# Altium PCB PCB1.PcbDoc
Units mil, origin at the board's own origin, x right, y up, seen from the top; angles counter-clockwise.
Board outline 6000 x 4000 mil, 2 copper layers (Top Layer, Bottom Layer); 51 components, 45 nets, 242 pads, 0 vias.
Unrouted connection lines stored in the file: 10.
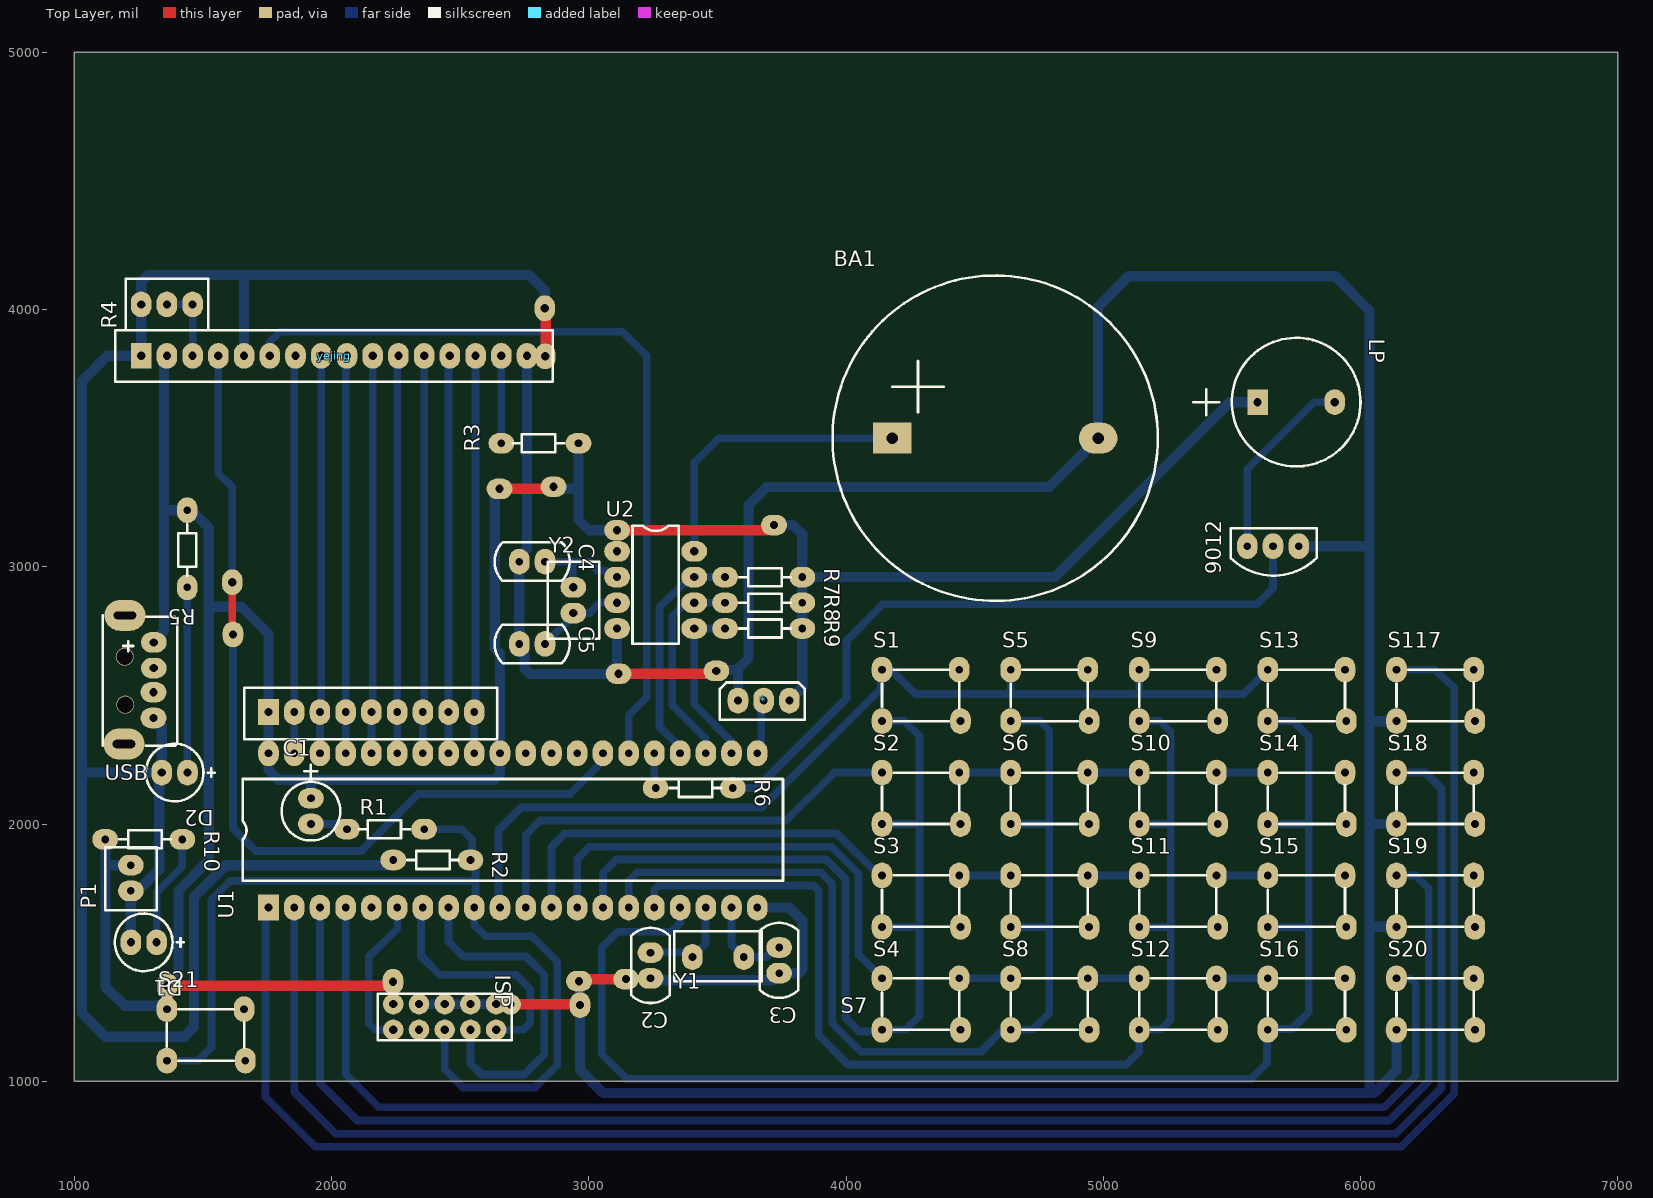
[diagram p0: Top Layer view]
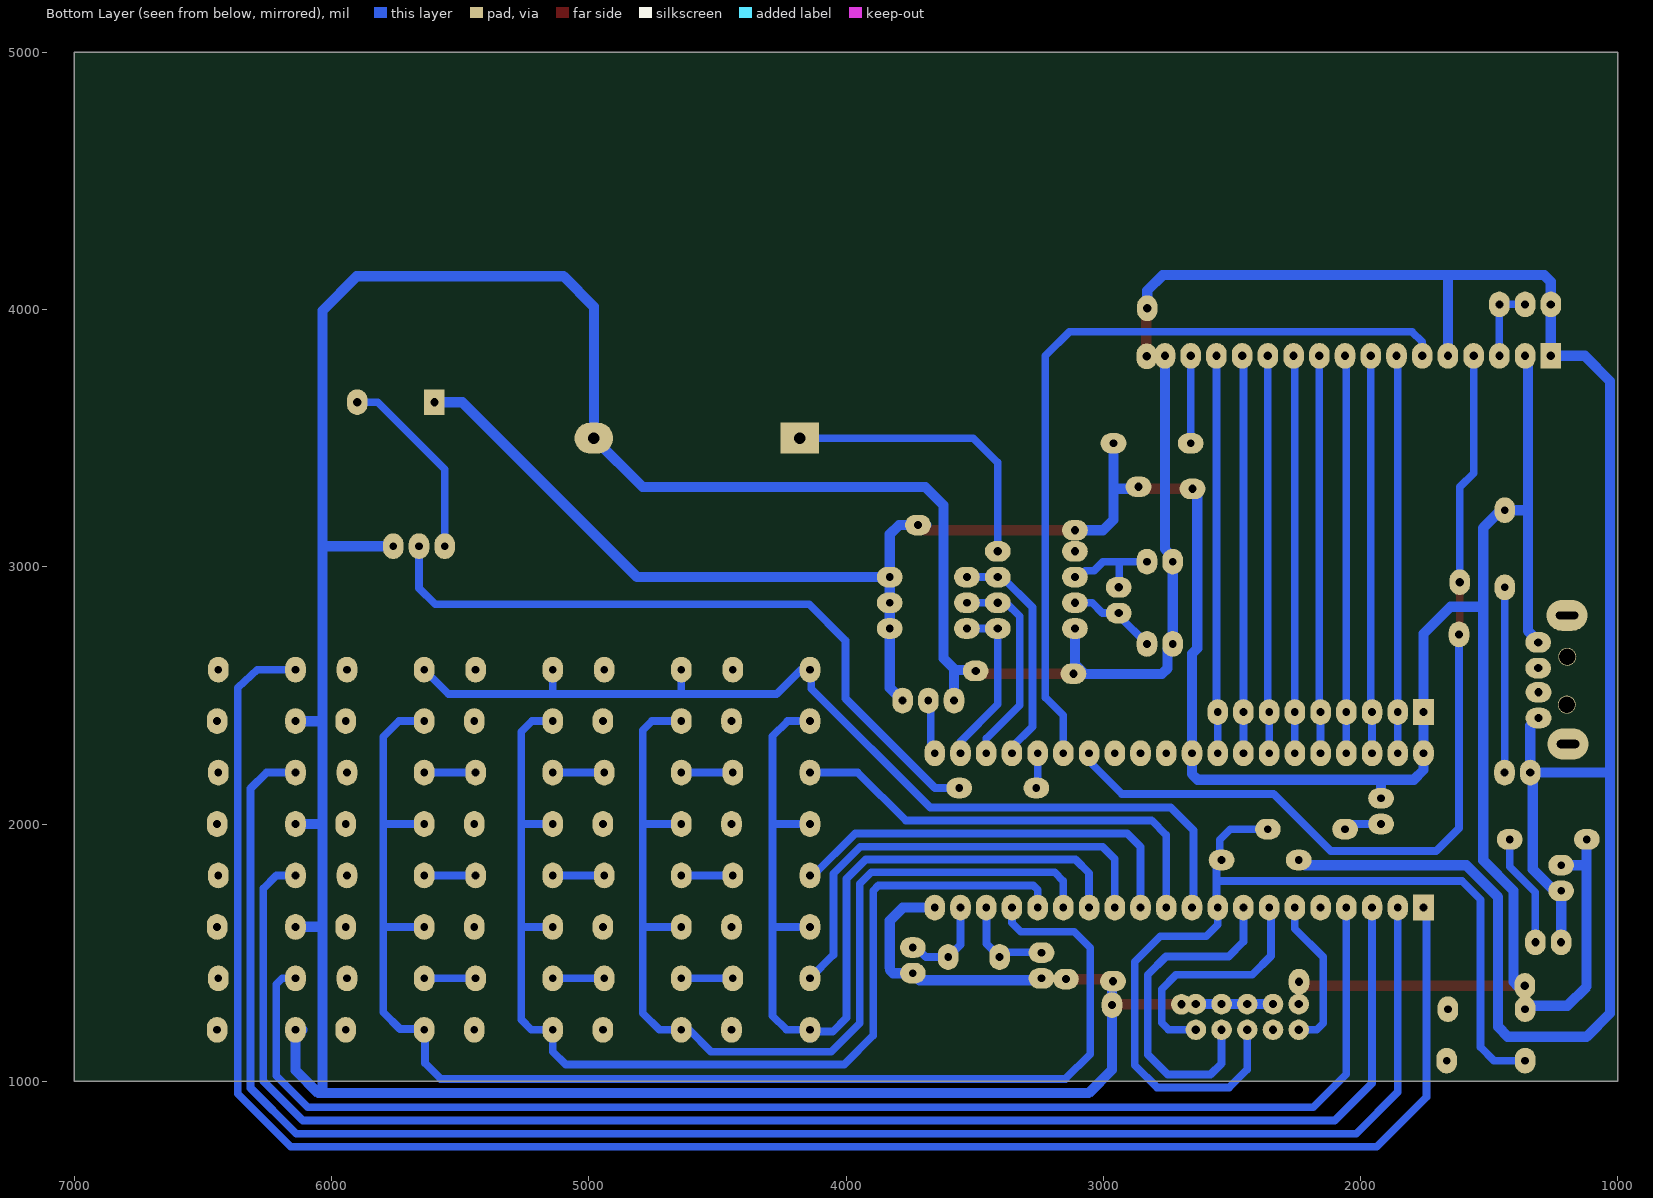
[diagram p1: Bottom Layer view, seen from below]

## Layer stack, top to bottom
Top Layer: signal copper 1.4
Dielectric: dielectric 12.6, FR-4, Dk 4.8
Bottom Layer: signal copper 1.4

## Board outline
1000,1000 7000,1000 7000,5000 1000,5000

## Design rules (kind name [scope] priority, off if disabled: settings)
Clearance [All] p1: gap=20
ComponentClearance [All] p1: gap=10 collisioncheckmode=3 verticalgap=10
PolygonConnect [All] p1: connectstyle=Relief reliefconductorwidth=10 reliefentries=4 polygonreliefangle="90 Angle"
RoutingVias [All] p1: holewidth=28 width=50 viastyle="Through Hole" minholewidth=28 minwidth=50 maxholewidth=28 maxwidth=50
SolderMaskExpansion [All] p1: expansion=4
TestPointUsage [All] p1: valid=0 allowmultiple=FALSE
Testpoint [All] p1: side=15 testpointundercomponent=TRUE minsize=40 maxsize=100 preferedsize=60 minholesize=0 maxholesize=40 preferedholesize=32 testpointgrid=1 style=1023 order=0123456789
Width Width_VCC [InNet('VCC')] p1: maxlimit=40 minlimit=40 preferedwidth=40
Width Width_GND [InNet('GND')] p2: maxlimit=40 minlimit=40 preferedwidth=40
Width [All] p3: maxlimit=30 minlimit=30 preferedwidth=30
18 further rules are at their usual default settings.

## Components (designator, comment, footprint, x,y, rotation, side; value= is the part's Value field where it differs from the comment)
9012 "PNP" 三极管 5760,3080 r180 top
* "18B20" 18B20 3580,2480 r0 top
BA1 "Battery" DIANZI 4180,3500 r0 top
C1 "Cap Pol1" 电解电容 1920,2100 r0 top
C2 "Cap" cap 3240,1500 r270 top
C3 "Cap" cap 3740,1520 r270 top
C4 "Cap" cap 2730,3020 r0 top
C5 "Cap" cap 2730,2700 r0 top
D1 "LED0" led 1320,1540 r180 top
D2 "LED0" led 1440,2200 r180 top
ISP "ISP" ISP 2240,1300 r0 top (schematic designator ?)
LP "Speaker" beep 5600,3640 r0 top
P1 "Header 2" 电源 1220,1740 r90 top
R1 "Res2" RES 2360,1980 r180 top
R2 "Res2" res 2240,1860 r0 top
R3 "Res2" res 2960,3480 r180 top
R4 "Res Tap" 3CZ 1360,4020 r90 top
R5 "Res2" RES 1439,3220 r270 top
R6 "Res2" res 3260,2140 r0 top
R7 "Res2" res 3530,2960 r0 top
R8 "Res2" res 3530,2860 r0 top
R9 "Res2" res 3530,2760 r0 top
R10 "Res2" res 1120,1940 r0 top
S1 "按键" AJ 4140,2600 r0 top
S2 "按键" AJ 4140,2200 r0 top
S3 "按键" AJ 4140,1800 r0 top
S4 "按键" AJ 4140,1400 r0 top
S5 "按键" AJ 4640,2600 r0 top
S6 "按键" AJ 4640,2200 r0 top
S7 "按键" AJ 4640,1800 r0 top
S8 "按键" AJ 4640,1400 r0 top
S9 "按键" AJ 5140,2600 r0 top
S10 "按键" AJ 5140,2200 r0 top
S11 "按键" AJ 5140,1800 r0 top
S12 "按键" AJ 5140,1400 r0 top
S13 "按键" AJ 5640,2600 r0 top
S14 "按键" AJ 5640,2200 r0 top
S15 "按键" AJ 5640,1800 r0 top
S16 "按键" AJ 5640,1400 r0 top
S18 "SW-PB" AJ 6140,2200 r0 top
S19 "SW-PB" AJ 6140,1800 r0 top
S20 "SW-PB" AJ 6140,1400 r0 top
S21 "SW-PB" AJ 1360,1280 r0 top
S117 "SW-PB" AJ 6140,2600 r0 top
U1 "AT89S52" AT89S52 1755,1975 r90 top
U2 "1302" DS1302 3110,3060 r0 top
USB "?" USB 1400,2300 r180 top
Y1 "XTAL" xtal 3603,1483 r180 top
Y2 "XTAL" xtalx 2940,2820 r90 top
yejing "1602" 1602 1260,3820 r90 top
? "上拉" 排阻 1755,2435 r90 top

## Footprints (in the part's own frame and the unit in brackets; to place one, negate y for a bottom-side part, rotate by r counter-clockwise, add the part's x,y. Pads: shape width x height; smd on the part's side, far side on the other; paste and mask are expansions set on the pad)
3CZ [mil]
  oval 100x80 hole 32: 1(0,100) 2(0,0) 3(0,-100)
  silkscreen extent -100,-160 100,160
18B20 [mil]
  oval 80x100 hole 30: 1(0,0) 2(100,0) 3(200,0)
  silkscreen extent -70,-75 260,70
1602 [mil]
  rect 100x80 hole 32: 1(0,0)
  oval 100x80 hole 32: 2(0,-100) 3(0,-200) 4(0,-300) 5(0,-400) 6(0,-500) 7(0,-600) 8(0,-700) 9(0,-800) 10(0,-900) 11(0,-1000) 12(0,-1100) 13(0,-1200) 14(0,-1300) 15(0,-1400) 16(0,-1500)
  silkscreen extent -100,-1600 100,100
AJ [mil]
  oval 80x100 hole 30: 1(0,-200) 2(0,0) 3(305,-200) 4(300,0)
  silkscreen extent 0,-200 300,0
AT89S52 [mil]
  rect 100x80 hole 30: 1(-300,0)
  oval 100x80 hole 30: 2(-300,-100) 3(-300,-200) 4(-300,-300) 5(-300,-400) 6(-300,-500) 7(-300,-600) 8(-300,-700) 9(-300,-800) 10(-300,-900) 11(-300,-1000) 12(-300,-1100) 13(-300,-1200) 14(-300,-1300) 15(-300,-1400) 16(-300,-1500) 17(-300,-1600) 18(-300,-1700) 19(-300,-1800) 20(-300,-1900) 21(300,-1900) 22(300,-1800) 23(300,-1700) 24(300,-1600) 25(300,-1500) 26(300,-1400) 27(300,-1300) 28(300,-1200) 29(300,-1100) 30(300,-1000) 31(300,-900) 32(300,-800) 33(300,-700) 34(300,-600) 35(300,-500) 36(300,-400) 37(300,-300) 38(300,-200) 39(300,-100) 40(300,0)
  silkscreen extent -195,-2000 200,100
beep [mil]
  rect 80x100 hole 32: 1(0,0)
  oval 80x100 hole 32: 2(300,0)
  silkscreen extent -250,-250 400,250
cap [mil]
  oval 80x100 hole 30: 1(0,0) 2(100,0)
  silkscreen extent -96,-75 196,75
DIANZI [mil]
  rect 150x120 hole 45: 1(0,0)
  oval 150x120 hole 45: 2(800,0)
  silkscreen extent -232,-632 1032,632
DS1302 [mil]
  oval 100x80 hole 32: 1(0,0) 2(0,-100) 3(0,-200) 4(0,-300) 5(300,-300) 6(300,-200) 7(300,-100) 8(300,0)
  silkscreen extent 60,-360 240,100
ISP [mil]
  round 80 hole 32: 1(0,-100) 2(0,0) 3(100,-100) 4(100,0) 5(200,-100) 6(200,0) 7(300,-100) 8(300,0) 9(400,-100) 10(400,0)
  silkscreen extent -60,-140 460,40
led [mil]
  oval 80x100 hole 32: 1(0,0) 2(100,0)
  silkscreen extent -106,-112 162,112
RES [mil]
  oval 100x80 hole 30: 1(0,0) 2(300,0)
  silkscreen extent 55,-35 255,35
res [mil]
  oval 100x80 hole 30: 1(0,0) 2(300,0)
  silkscreen extent 55,-35 255,35
USB [mil]
  oval 100x80 hole 32: 1(91,-406) 2(91,-306) 3(92,-212) 4(92,-112)
  round 70 hole 65: 5(202,-164) 6(204,-350)
  oval 160x120 hole 32 slot 86.61 at 0 deg: 32(207,-11)
  oval 160x120 hole 30 slot 86.61 at 0 deg: ""(203,-511)
  silkscreen extent 0,-511 290,-4
xtal [mil]
  oval 80x100 hole 30: 1(0,0) 2(200,0)
  silkscreen extent -70,-100 270,95
xtalx [mil]
  oval 80x100 hole 32: 1(0,0) 2(100,0)
  silkscreen extent -100,-100 200,100
三极管 [mil]
  oval 80x100 hole 30: 1(0,0) 2(100,0) 3(200,0)
  silkscreen extent -70,-70 265,114
排阻 [mil]
  rect 100x80 hole 30: 0(0,0)
  oval 100x80 hole 30: 1(0,-100) 2(0,-200) 3(0,-300) 4(0,-400) 5(0,-500) 6(0,-600) 7(0,-700) 8(0,-800)
  silkscreen extent -105,-890 95,95
电源 [mil]
  oval 80x100 hole 30: 1(0,0) 2(100,0)
  silkscreen extent -75,-100 170,100
电解电容 [mil]
  oval 100x80 hole 30: 1(0,0) 2(0,-100)
  silkscreen extent -114,-164 114,130

## Part data
9012: "PNP Bipolar Transistor"
BA1: "Multicell Battery"
C1: "Polarized Capacitor (Radial)"
C2 C3 C4 C5: "Capacitor"
D1 D2: "Typical INFRARED GaAs LED"
ISP: library part isp
LP: "Loudspeaker"
P1: "Header, 2-Pin"
R1 R2 R3 R5 R6 R7 R8 R9 R10: "Resistor"
R4: "Tapped Resistor"
S18 S19 S20 S21 S117: "Switch"
U2: library part DS1302
USB: library part USB
Y1 Y2: "Crystal Oscillator"
?: library part 排阻

## Free pads (board coordinates)
  oval 80x100 hole 32: 1(1361,1371) 1(1614,2940) 1(2831,3818) 2(1617,2737) 2(2239,1387) 2(2829,4005) 2(2966,1296)
  oval 100x80 hole 32: 1(2653,3303) 1(3110,3142) 1(3116,2584) 1(3145,1397) 2(2863,3311) 2(2962,1389) 2(3496,2595) 2(3720,3162)
  round 80 hole 32: 1(2696,1299)

## Nets (pads, with @x,y where several pads share a name; then routed paths per layer and width w, separated by ;. In a path a pad name is that pad's centre, name@x,y a point inside that pad or via, vN(x,y) a via of type N, cw(c..) or ccw(c..) an arc to the next point about the centre after c; other vN are vias at no path point)
GND: 9012.1 *.1 BA1.2 C2.2 C3.2 C4.1 C5.1 D1.2 D2.2 ISP.4 ISP.6 ISP.8 ISP.10 P1.1 pad.1@2696,1299 pad.1@2831,3818 pad.1@3116,2584 pad.1@3145,1397 pad.2@2829,4005 pad.2@2962,1389 pad.2@2966,1296 pad.2@3496,2595 R2.1 R4.1 S18.1 S19.1 S20.1 S117.1 U1.20 U2.4 USB.4 yejing.1 yejing.5 yejing.16 | length 23546.4
  Top Layer w40: pad.1@2696,1299 2963,1299 pad.2@2966,1296 ; pad.1@2833,3820 pad.2@2833,4014 ; pad.2@2948,1396 pad.1@3136,1396 ; pad.1@3116,2584 pad.2@3495,2584
  Bottom Layer w40: 1030,2205 1035,2200 D2.2 1340,2382 1310,2412 USB.4 ; D1.2 P1.1 1246,1740 1330,1824 D2.2@1330,2167 ; yejing.5 1660,4134 ; R2.1@2245,1870 2215,1840 1589,1840 1465,1716 1465,1211 1427,1173 1121,1173 1030,1264 1030,3722 1128,3820 yejing.1 1260,4108 1286,4134 2769,4134 2829,4074 pad.2@2829,4005 ; ISP.4 ISP.10@2646,1300 ; C4.1 C5.1 2750,2680 2750,2605 2772,2583 3072,2583 3110,2621 U2.4 ; C4.1@2730,3038.73 2760,3068.73 yejing.16 ; pad.2@2966,1389 2966,1045 3057,954 6051,954 6140,1043 S20.1 S20.1@6114,1200 ; pad.1@3091,2584 pad.1@3140,2584 ; C2.2@3240,1393 3713,1393 C3.2 3817,1420 3829.28,1432.28 ; pad.2@3507,2599 3565,2599 ; *.1 3580,2603 3621,2644 3621,3239 3692,3310 4790,3310 BA1.2 4980,4011 5098,4129 5902,4129 6035,3996 6035,965 ; U1.20 3779,1675 3830,1624 3830,1442 ; 9012.1 6023,3080 6035,3092 ; 6035,1991 6044,2000 S18.1 ; 6035,2389 6046,2400 S117.1 ; 6049,1600 S19.1
Net9012_2: 9012.2 R6.2 | length 2716.6
  Bottom Layer w30: R6.2 3654,2140 4002,2488 4002,2713 4143,2854 5597,2854 5660,2917 9012.2
Net9012_3: 9012.3 LP.2 | length 747.1
  Bottom Layer w30: 9012.3 5560,3379 5821,3640 LP.2
Net*_2: *.2 U1.21 | length 211.2
  Bottom Layer w30: U1.21 3670,2290 *.2@3670,2480
NetBA1_1: BA1.1 U2.8 | length 1154.4
  Bottom Layer w30: U2.8 3410,3405 3505,3500 BA1.1
NetC1_2: C1.2 R1.2 | length 120
  Bottom Layer w30: C1.2 R1.2@2040,2000
NetC2_1: C2.1 U1.18 Y1.2 | length 402.5
  Bottom Layer w30: C2.1@3240,1520 3259,1501 3385,1501 Y1.2 3454,1534 U1.18@3454,1686
NetC3_1: C3.1 U1.19 Y1.1 | length 350.5
  Bottom Layer w30: U1.19 3555,1531 Y1.1 3689.31,1483 C3.1@3726.31,1520
NetC4_2: C4.2 U2.2 Y2.2 | length 405.7
  Bottom Layer w30: C4.2 3001,3020 3036,2985 3070,2985 3095,2960 U2.2 ; 2938,3020 2938,2922 Y2.2
NetC5_2: C5.2 U2.3 Y2.1 | length 352.1
  Bottom Layer w30: C5.2 2940,2810 Y2.1 3003,2820 3043,2860 U2.3
NetD1_1: D1.1 R10.2 | length 441.4
  Bottom Layer w30: D1.1 1320,1734 1420,1834 R10.2
NetD2_1: D2.1 R5.2 | length 719
  Bottom Layer w30: D2.1@1439,2201 R5.2
NetR3_2: R3.2 yejing.15 | length 340
  Bottom Layer w30: R3.2 yejing.15
NetR4_2: R4.2 R4.3 yejing.3 | length 300
  Bottom Layer w30: R4.2 R4.3 yejing.3
P00: ?.1 U1.39 yejing.7 | length 1547.1
  Bottom Layer w30: U1.39 1855,3815 yejing.7
P01: ?.2 U1.38 yejing.8 | length 1531
  Bottom Layer w30: U1.38 ?.2 ; ?.2@1960,2449 yejing.8
P02: ?.3 U1.37 yejing.9 | length 1547.1
  Bottom Layer w30: U1.37 2055,3815 yejing.9
P03: ?.4 U1.36 yejing.10 | length 1568.7
  Bottom Layer w30: ?.4@2151,2433 2160,2424 yejing.10 ; U1.36 ?.4
P04: ?.5 U1.35 yejing.11 | length 1540
  Bottom Layer w30: U1.35 yejing.11@2255,3815
P05: ?.6 U1.34 yejing.12 | length 1547.1
  Bottom Layer w30: U1.34 ?.6 2360,2440 yejing.12
P06: ?.7 U1.33 yejing.13 | length 1547.1
  Bottom Layer w30: U1.33 2455,3815 yejing.13
P07: ?.8 U1.32 yejing.14 | length 1547.1
  Bottom Layer w30: U1.32 ?.8 2560,2440 yejing.14
P10: S117.2 U1.1 | length 7351.6
  Bottom Layer w30: U1.1@1743,1672 1743,939 1937,745 6159,745 6365,951 6365,2529.89 6287.73,2600 S117.2
P11: S18.2 U1.2 | length 6673.6
  Bottom Layer w30: U1.2 1855,958 2017.12,795.88 6127.88,795.88 ; 6137,795.88 6315,973.88 6315,2138 6253,2200 S18.2
P12: S19.2 U1.3 | length 6010.7
  Bottom Layer w30: U1.3 1955,992 2099.69,847.31 6111.31,847.31 6265,1001 6265,1749 6214,1800 S19.2
P13: S20.2 U1.4 | length 5351.7
  Bottom Layer w30: U1.4 2055,1027 2183.25,898.75 6091.75,898.75 6215,1022 6215,1377 6192,1400 S20.2
P15: ISP.1 U1.6 | length 600.9
  Bottom Layer w30: ISP.1 2170,1200 2145,1225 2145,1483 2255,1593 U1.6
P16: ISP.9 U1.7 | length 934.6
  Bottom Layer w30: U1.7@2348,1668 2348,1487 2421,1414 2717,1414 2773,1358 2773,1227 2746,1200 ISP.9
P17: ISP.7 U1.8 | length 1336.1
  Bottom Layer w30: U1.8 2455,1542 2512,1485 2756,1485 2827,1414 2827,1104 2749,1026 2583,1026 2540,1069 ISP.7
P21: R9.1 U1.22 U2.5 | length 665.1
  Bottom Layer w30: R9.1 U2.5 3410,2465 3555,2320 U1.22
P22: R8.1 U1.23 U2.6 | length 812.8
  Bottom Layer w30: U1.23 3455,2332 3325,2462 3325,2807 3378,2860 R8.1
P23: R7.1 U1.24 U2.7 | length 904.7
  Bottom Layer w30: U1.24 3355,2298 3275,2378 3275,2843.12 3391.88,2960 R7.1
P24: R6.1 U1.25 | length 130
  Bottom Layer w30: R6.1@3255,2145 U1.25
P25: U1.26 yejing.6 | length 3148.5
  Bottom Layer w30: yejing.6 1760,3874 1800,3914 3131,3914 3225,3820 3225,2492 3155,2422 U1.26
P26: pad.1@1614,2940 pad.2@1617,2737 U1.27 yejing.4 | length 3523
  Top Layer w30: pad.1@1614,2940 1614,2740 pad.2@1617,2737
  Bottom Layer w30: yejing.4 1560,3364 1614,3310 pad.1@1614,2940 ; pad.2@1617,2750 1617,1984 1706,1895 2116,1895 2338,2117 2928,2117 3055,2244 U1.27
P30: S1.2 S5.2 S9.2 S13.2 U1.10 | length 3856.5
  Bottom Layer w30: U1.10@2649,1667 2649,1976 2737,2064 3673,2064 4135,2526 4135,2600 4175,2600 4270,2505 5545,2505 S13.2 ; 4640,2519 S5.2 ; 5140,2505 S9.2
P31: S2.2 S6.2 S10.2 S14.2 U1.11 | length 2367.7
  Bottom Layer w30: U1.11 2755,1957 2812,2014 3768,2014 3954,2200 S2.2 ; 4440,2200 S6.2 ; 4940,2200 S10.2 ; 5440,2200 S14.2
P32: S3.2 S7.2 S11.2 S15.2 U1.12 | length 2210.1
  Bottom Layer w30: U1.12 2855,1911 2907,1963 3963.81,1963 4126.81,1800 S3.2 ; 4440,1800 S7.2 ; 4940,1800 S11.2 ; 5440,1800 S15.2
P33: S4.2 S8.2 S12.2 S16.2 U1.13 | length 2390.8
  Bottom Layer w30: U1.13 2955,1864 3003,1912 3944,1912 4049.5,1806.5 ; 4049,1806 4049,1491 S4.2 ; 4440,1400 S8.2 ; 4940,1400 S12.2 ; 5440,1400 S16.2
P34: S1.1 S2.1 S3.1 S4.1 U1.14 | length 3565.2
  Bottom Layer w30: U1.14 3055,1809 3108,1862 3923,1862 3998,1787 3998,1247 4052,1193 4112,1193 S4.1@4140,1165 ; S4.1 4231,1200 4286,1255 4286,2341 4227,2400 S1.1 ; S3.1 4283,1600 ; S2.1 4274,2000 4286,2012
P35: S5.1 S6.1 S7.1 S8.1 U1.15 | length 3980.3
  Bottom Layer w30: U1.15 3155,1778 3189,1812 3902,1812 3947,1767 3947,1226 4058,1115 4525,1115 4610,1200 4725,1200 4790,1265 4790,2365 4755,2400 S5.1 ; S7.1 4788,1600 ; S6.1 4788,2000
P36: S9.1 S10.1 S11.1 S12.1 U1.16 | length 4346.7
  Bottom Layer w30: U1.16 3255,1744 3272,1761 3874,1761 3894,1741 3894,1178 4007,1065 5090,1065 5140,1115 S12.1 ; S12.1@5129,1200 5223,1200 5263,1240 5263,2358 5221,2400 S9.1 ; S11.1 5251,1600 5262,1611 ; S10.1 5255,2000 5263,2008
P37: S13.1 S14.1 S15.1 S16.1 U1.17 | length 5390.1
  Bottom Layer w30: U1.17 3355,1616 3320,1581 3113,1581 3051,1519 3051,1105 3147,1009 5576,1009 5636.37,1069.37 S16.1@5636.37,1211.37 ; S16.1@5631,1200 5628,1203 5734,1203 5799,1268 5799,2339 5738,2400 S13.1 ; S15.1 5792,1600 5799,1607 ; S14.1 5793,2000 5799,2006
RST: ISP.5 R1.1 R2.2 S21.1 U1.9 | length 3779.1
  Bottom Layer w30: S21.1 1481,1080 1533,1132 1533,1706 1605,1778 2560,1778 ; R1.1 2506,1980 2547,1939 R2.2@2547,1866 ; ISP.5 2440,1046 2510,976 2791,976 2877,1062 2877,1465 2778,1564 2599,1564 2555,1608 U1.9 U1.9@2550,1680 ; R2.2@2558,1856 R2.2@2560,1854 ; U1.9@2560,1680 R2.2@2560,1840
VCC: *.3 ?.0 C1.1 ISP.2 LP.1 P1.2 pad.1@1361,1371 pad.1@2653,3303 pad.1@3110,3142 pad.2@2239,1387 pad.2@2863,3311 pad.2@3720,3162 R3.1 R5.1 R7.2 R8.2 R9.2 R10.1 S21.2 U1.31 U1.40 U2.1 USB.1 yejing.2 | length 12203.1
  Top Layer w40: pad.1@1361,1371 2223,1371 pad.2@2239,1387 ; pad.1@2653,3303 2857,3303 pad.2@2871,3317 ; pad.1@3110,3142 pad.2@3692,3142
  Bottom Layer w40: R10.1@1121,1946 1121,1368 1196,1293 S21.2@1367,1293 ; 1125,1840 P1.2 ; USB.1 1309,2711 1349,2751 yejing.2@1349,3820 ; 1350,3220 1454,3220 1523,3151 1523,1859 1405,1741 1405,1386 1390,1371 pad.1@1361,1371 ; 1525,2845 1650,2845 1755,2740 1755,2210 1793,2172 2633,2172 2655,2194 2655,2662.16 2635,2682.16 2635,3285 pad.1@2653,3303 ; C1.1 1920,2165 ; pad.2@2851,3303 2960,3303 ; R3.1 2960,3183 3001,3142 pad.1@3110,3142 ; pad.2@3688,3162 3794,3162 3830,3126 3830,2530 *.3 ; R7.2 4812,2960 5492,3640 LP.1
pads on no net: ISP.3 S1.3 S1.4 S2.3 S2.4 S3.3 S3.4 S4.3 S4.4 S5.3 S5.4 S6.3 S6.4 S7.3 S7.4 S8.3 S8.4 S9.3 S9.4 S10.3 S10.4 S11.3 S11.4 S12.3 S12.4 S13.3 S13.4 S14.3 S14.4 S15.3 S15.4 S16.3 S16.4 S18.3 S18.4 S19.3 S19.4 S20.3 S20.4 S21.3 S21.4 S117.3 S117.4 U1.5 U1.28 U1.29 U1.30 USB. USB.2 USB.3 USB.5 USB.6 USB.32